# EAGLE board at88g.v2 (EAGLE 4.11)
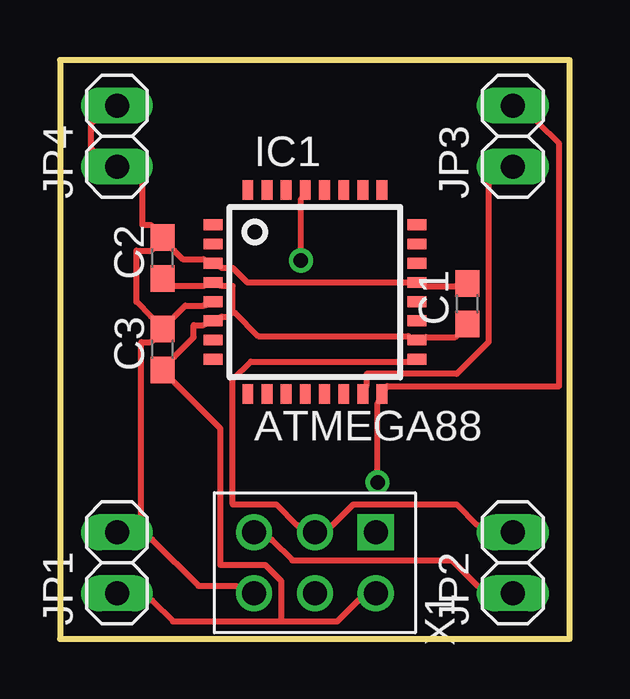
[diagram p0: board, top side]
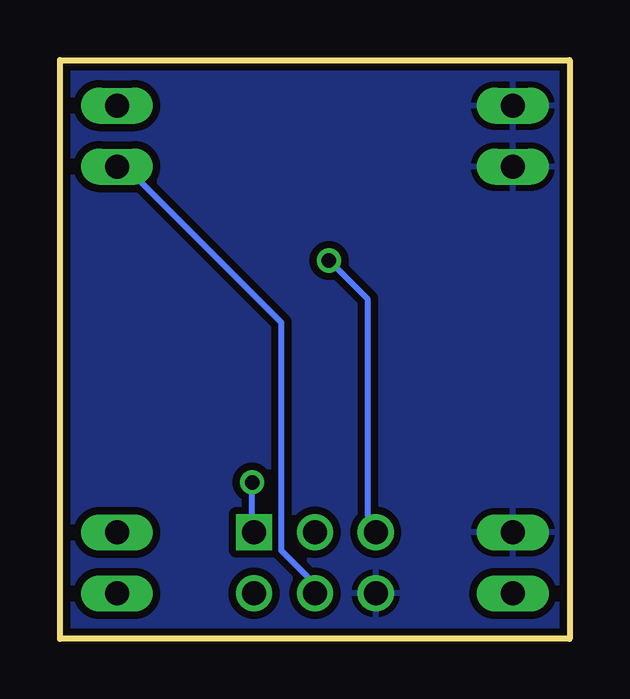
[diagram p1: board, bottom side, seen from below]

Size 21.26 x 24.12 mm. Coordinates in mm from the lower left corner, seen from the top.
Outline: 0,0 21.26,0 21.26,24.12 0,24.12 0,0
Copper layers (1*16): Top 0.035mm / dielectric 1.5mm / Bottom 0.035mm
Design rules "default": minimum track width 10mil, minimum drill 0.6mm, track to track 10mil, track to pad 10mil, pad to pad 10mil, via to via 10mil, smd to smd 10mil, copper to edge 10mil, drill to drill 10mil, minimum pad ring 10mil, minimum via ring 8mil, stop-mask expansion 4mil, vias tented up to drill 0mil, thermal gap 10mil

## Footprints (pad centres in the part's own frame; a part is rotated, then mirrored left to right if it is on the bottom)
C0603 = smd 1.1 x 1: 1 -0.85,0; 2 0.85,0
TQFP32 = smd 0.8 x 0.45: 1 -4.25,2.65; 2 -4.25,1.85; 3 -4.25,1.05; 4 -4.25,0.25; 5 -4.25,-0.55; 6 -4.25,-1.35; 7 -4.25,-2.15; 8 -4.25,-2.95; 17 4.25,-2.95; 18 4.25,-2.15; 19 4.25,-1.35; 20 4.25,-0.55; 21 4.25,0.25; 22 4.25,1.05; 23 4.25,1.85; 24 4.25,2.65 | smd 0.45 x 0.8: 9 -2.8,-4.4; 10 -2,-4.4; 11 -1.2,-4.4; 12 -0.4,-4.4; 13 0.4,-4.4; 14 1.2,-4.4; 15 2,-4.4; 16 2.8,-4.4; 25 2.8,4.1; 26 2,4.1; 27 1.2,4.1; 28 0.4,4.1; 29 -0.4,4.1; 30 -1.2,4.1; 31 -2,4.1; 32 -2.8,4.1
1X02 = drill 1 long: 1 -1.27,0; 2 1.27,0
6PIN = drill 1 square: 1 -1.27,2.54 | drill 1 round: 2 1.27,2.54; 3 -1.27,0; 4 1.27,0; 5 -1.27,-2.54; 6 1.27,-2.54

## Placement (x,y rotation side)
C1  [C0603]  16.98,13.97 90 top
C2  [C0603]  4.28,15.87 90 top
C3  [C0603]  4.28,12.06 90 top
IC1  ATMEGA88  [TQFP32]  10.63,14.6 0 top
JP1  [1X02]  2.38,3.17 90 top
JP2  [1X02]  18.89,3.17 90 top
JP3  [1X02]  18.89,20.95 90 top
JP4  [1X02]  2.38,20.95 90 top
X1  AVRISP6PIN  [6PIN]  10.63,3.17 270 top

## Library data of the parts
C1-C3 = rcl
IC1 = atmega88
JP1-JP4 = pinhead-mm
X1 = avrisp

## Nets
GND0: C1.2 C2.2 C3.2 IC1.3 IC1.5 IC1.21 JP1.2 JP4.1 JP4.2 X1.6
N$1: IC1.29 JP2.1 X1.5
N$2: IC1.15 JP3.1 X1.4
N$3: IC1.16 JP3.2 X1.1
N$4: IC1.17 JP2.2 X1.3
VCC0: C1.1 C2.1 C3.1 IC1.4 IC1.6 IC1.18 JP1.1 X1.2

## Tracks (layer width: path | path; a pad name or v marks a point on that pad's centre or on a via)
GND0
  Top 0.254: X1.6 7.35,2.2 5.78,2.2 3.85,4.13 JP1.2 3.39,5.15 3.39,12.36 3.8,12.36 C3.2 | JP4.2 1.31,21.51 1.31,20.39 JP4.1 3.44,18.97 3.44,17.24 3.8,17.24 C2.2 | IC1.5 5.98,13.89 5.22,13.89 4.76,13.43 C3.2 | C1.2 16.5,14.7 15.28,14.7 IC1.21 14.52,14.85 7.81,14.85 7.2,15.46 6.74,15.46 IC1.3 5.98,15.82 5.12,15.82 4.76,16.17 C2.2 | C3.2 3.8,13.43 3.19,14.04 3.19,16.17 3.8,16.17 C2.2
  pour Bottom (isolate 0.305): -0.17,24.25 21.43,24.25 21.43,-0.13 -0.17,-0.13
N$1  (via drill 0.6)
  Top 0.254: v10.05,15.77 10.05,18.31 IC1.29 | JP2.1 17.41,2.2 16.35,3.27 9.69,3.27 8.83,4.13 X1.5
  Bottom 0.254: v10.05,15.77 8.42,14.14 8.42,5.15 X1.5
N$2
  Top 0.254: IC1.15 12.79,10.59 12.79,11.04 16.55,11.04 17.87,12.36 17.87,18.97 JP3.1
  Bottom 0.254: X1.4 10.96,2.61 12.03,3.68 12.03,13.18 17.82,18.97 JP3.1
N$3  (via drill 0.6)
  Top 0.254: v13.25,6.52 13.25,9.83 IC1.16 13.65,10.54 20.82,10.54 20.82,20.64 19.95,21.51 JP3.2
  Bottom 0.254: v13.25,6.52 13.25,5.15 X1.1
N$4
  Top 0.254: IC1.17 14.52,11.55 7.96,11.55 7.2,10.79 7.2,5.61 9.03,5.61 9.89,4.74 X1.3 11.37,4.74 12.23,5.61 16.55,5.61 17.41,4.74 JP2.2
VCC0
  Top 0.254: C1.1 16.5,12.57 15.28,12.57 IC1.18 14.52,12.62 8.27,12.62 7.3,13.58 7.2,13.64 | 7.2,13.64 7,13.43 6.74,13.43 IC1.6 5.98,13.08 5.58,13.08 5.58,12.57 4.76,11.75 C3.1 4.76,10.69 6.69,8.76 6.69,3.07 8.57,3.07 9.23,2.41 9.23,0.73 | 7.2,13.64 7.2,14.7 6.74,14.7 IC1.4 5.98,14.7 4.76,14.7 C2.1 | 9.23,0.73 11.57,0.73 12.43,1.59 X1.2 | 9.23,0.73 4.71,0.73 3.85,1.59 JP1.1